# Altium PCB 3043-1-1532.PcbDoc (part 1 of 2)
Units mm, origin at the board's own origin, x right, y up, seen from the top; angles counter-clockwise.
Board outline 86 x 85.71 mm, 4 copper layers (Top Layer, MidLayer1, MidLayer2, Bottom Layer); 155 components, 106 nets, 490 pads, 369 vias.
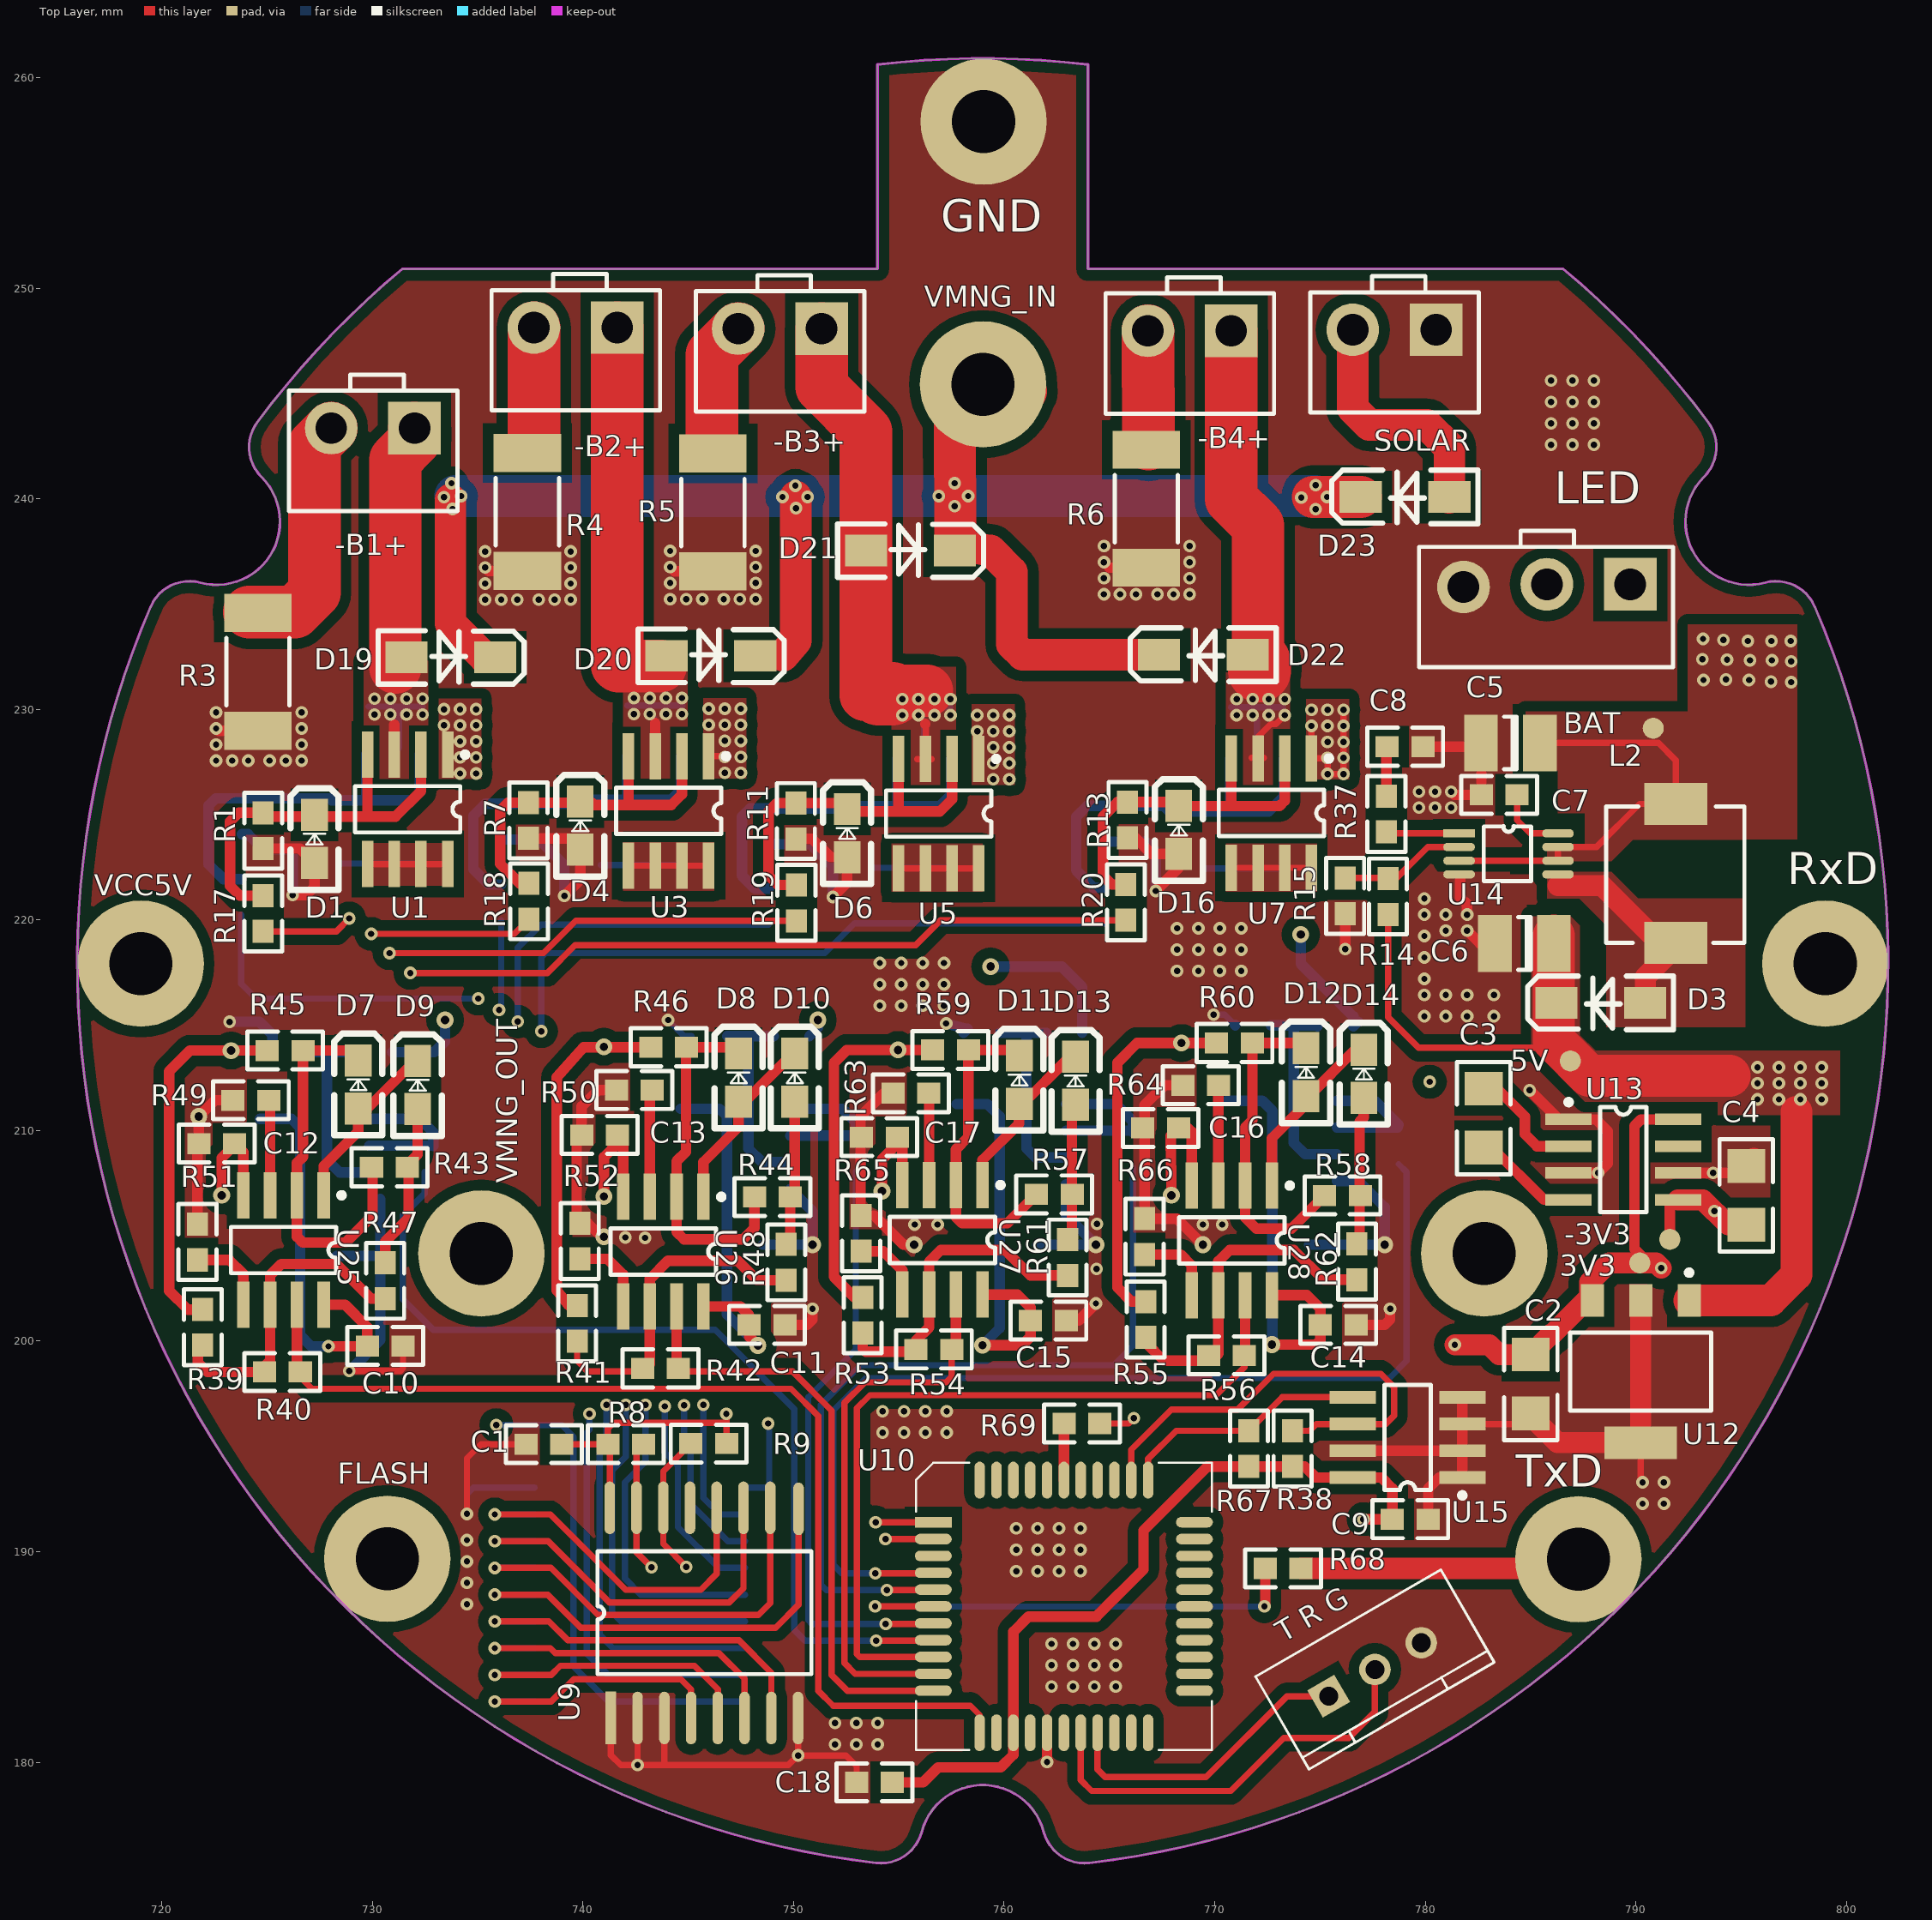
[diagram p0: Top Layer view]
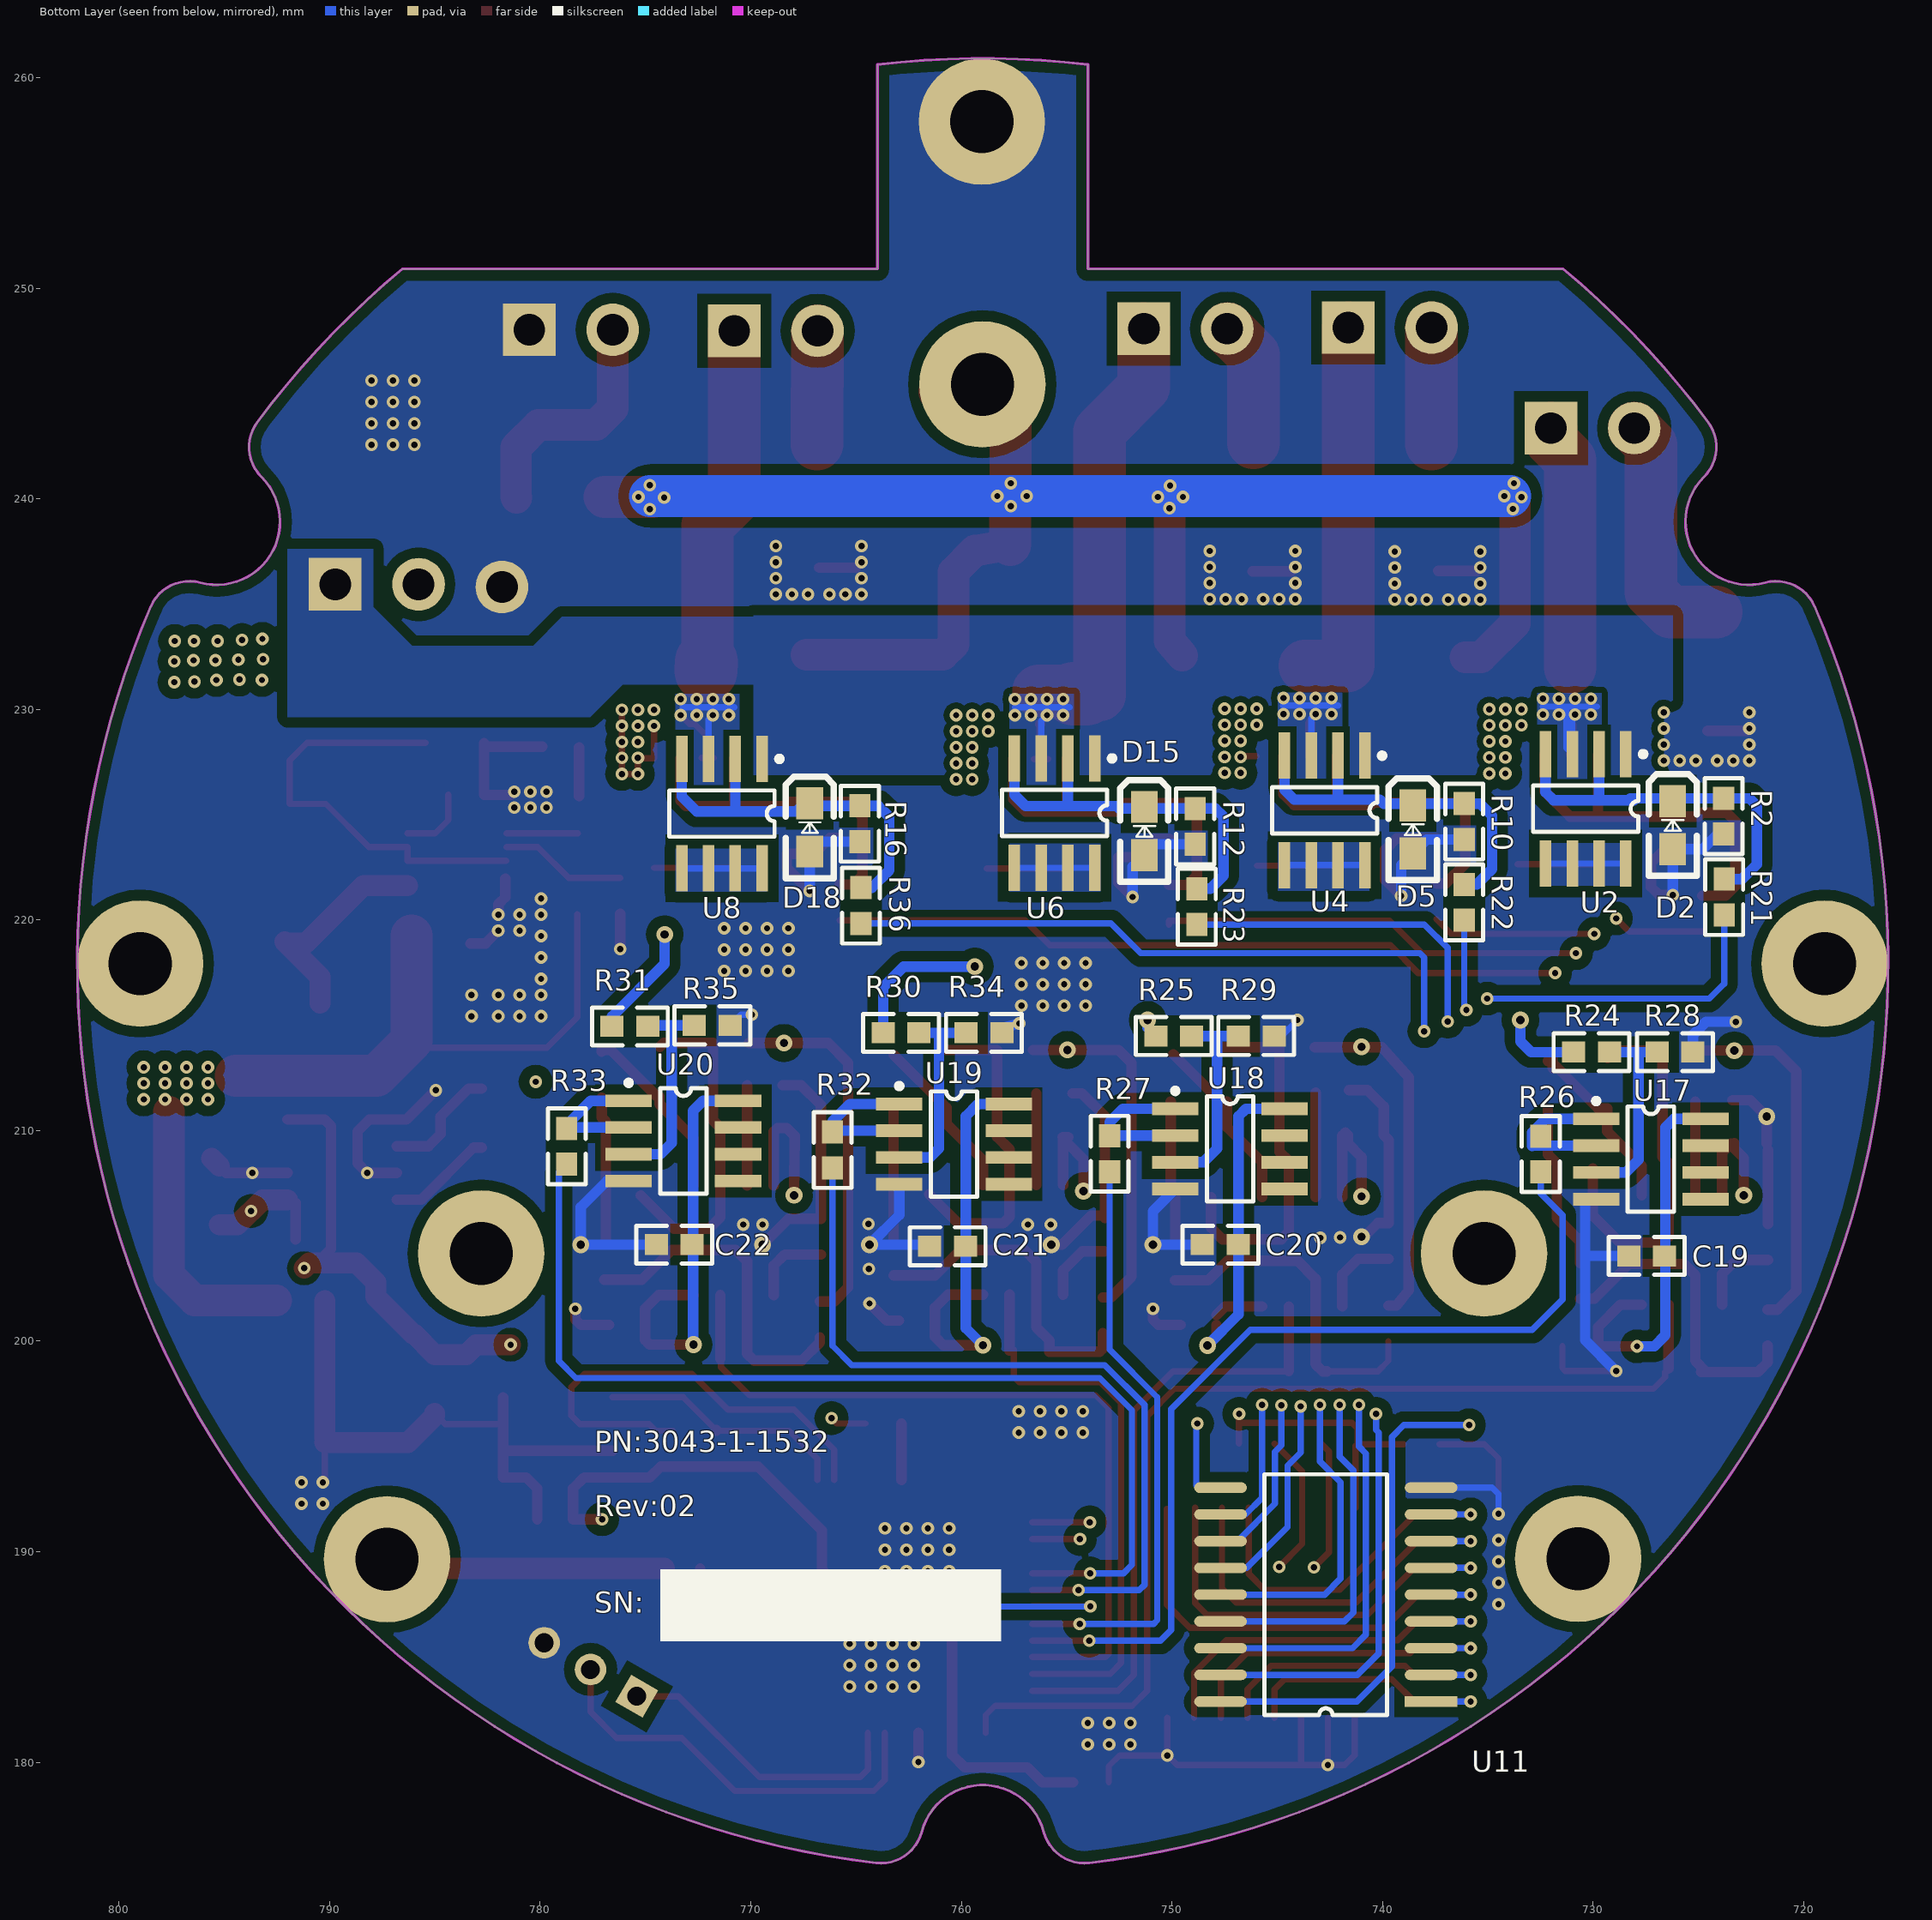
[diagram p1: Bottom Layer view, seen from below]
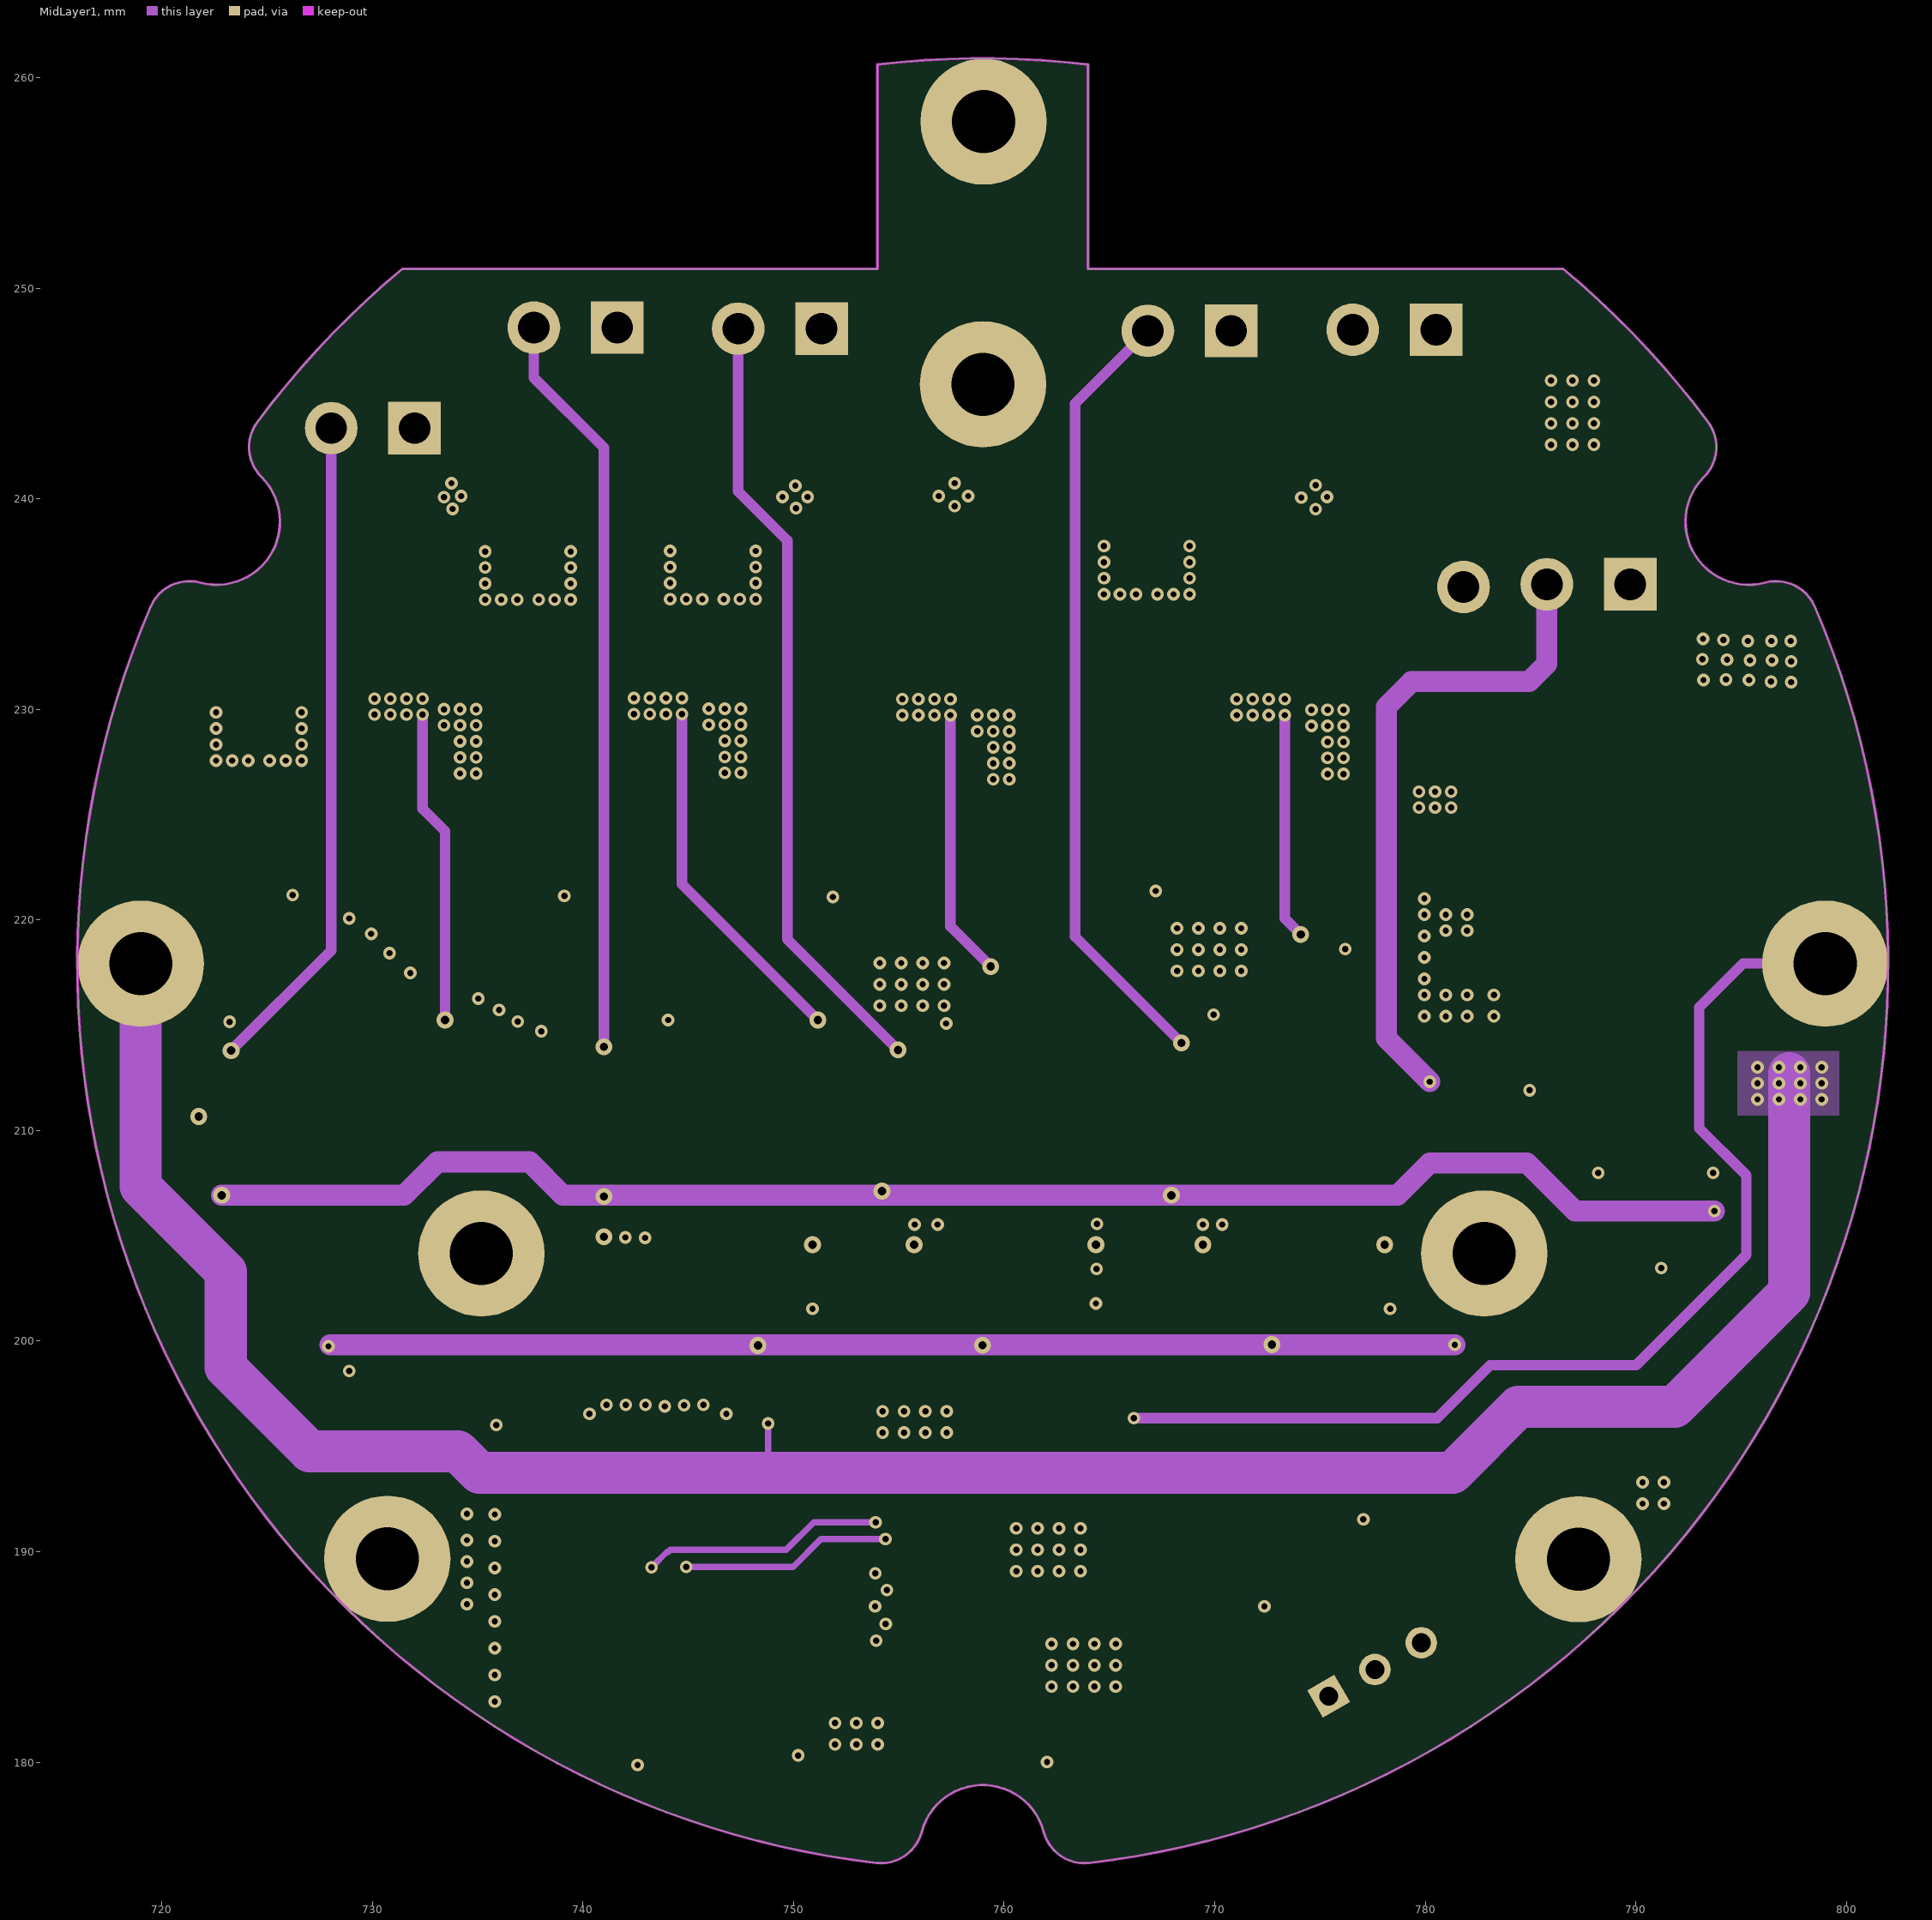
[diagram p2: MidLayer1]
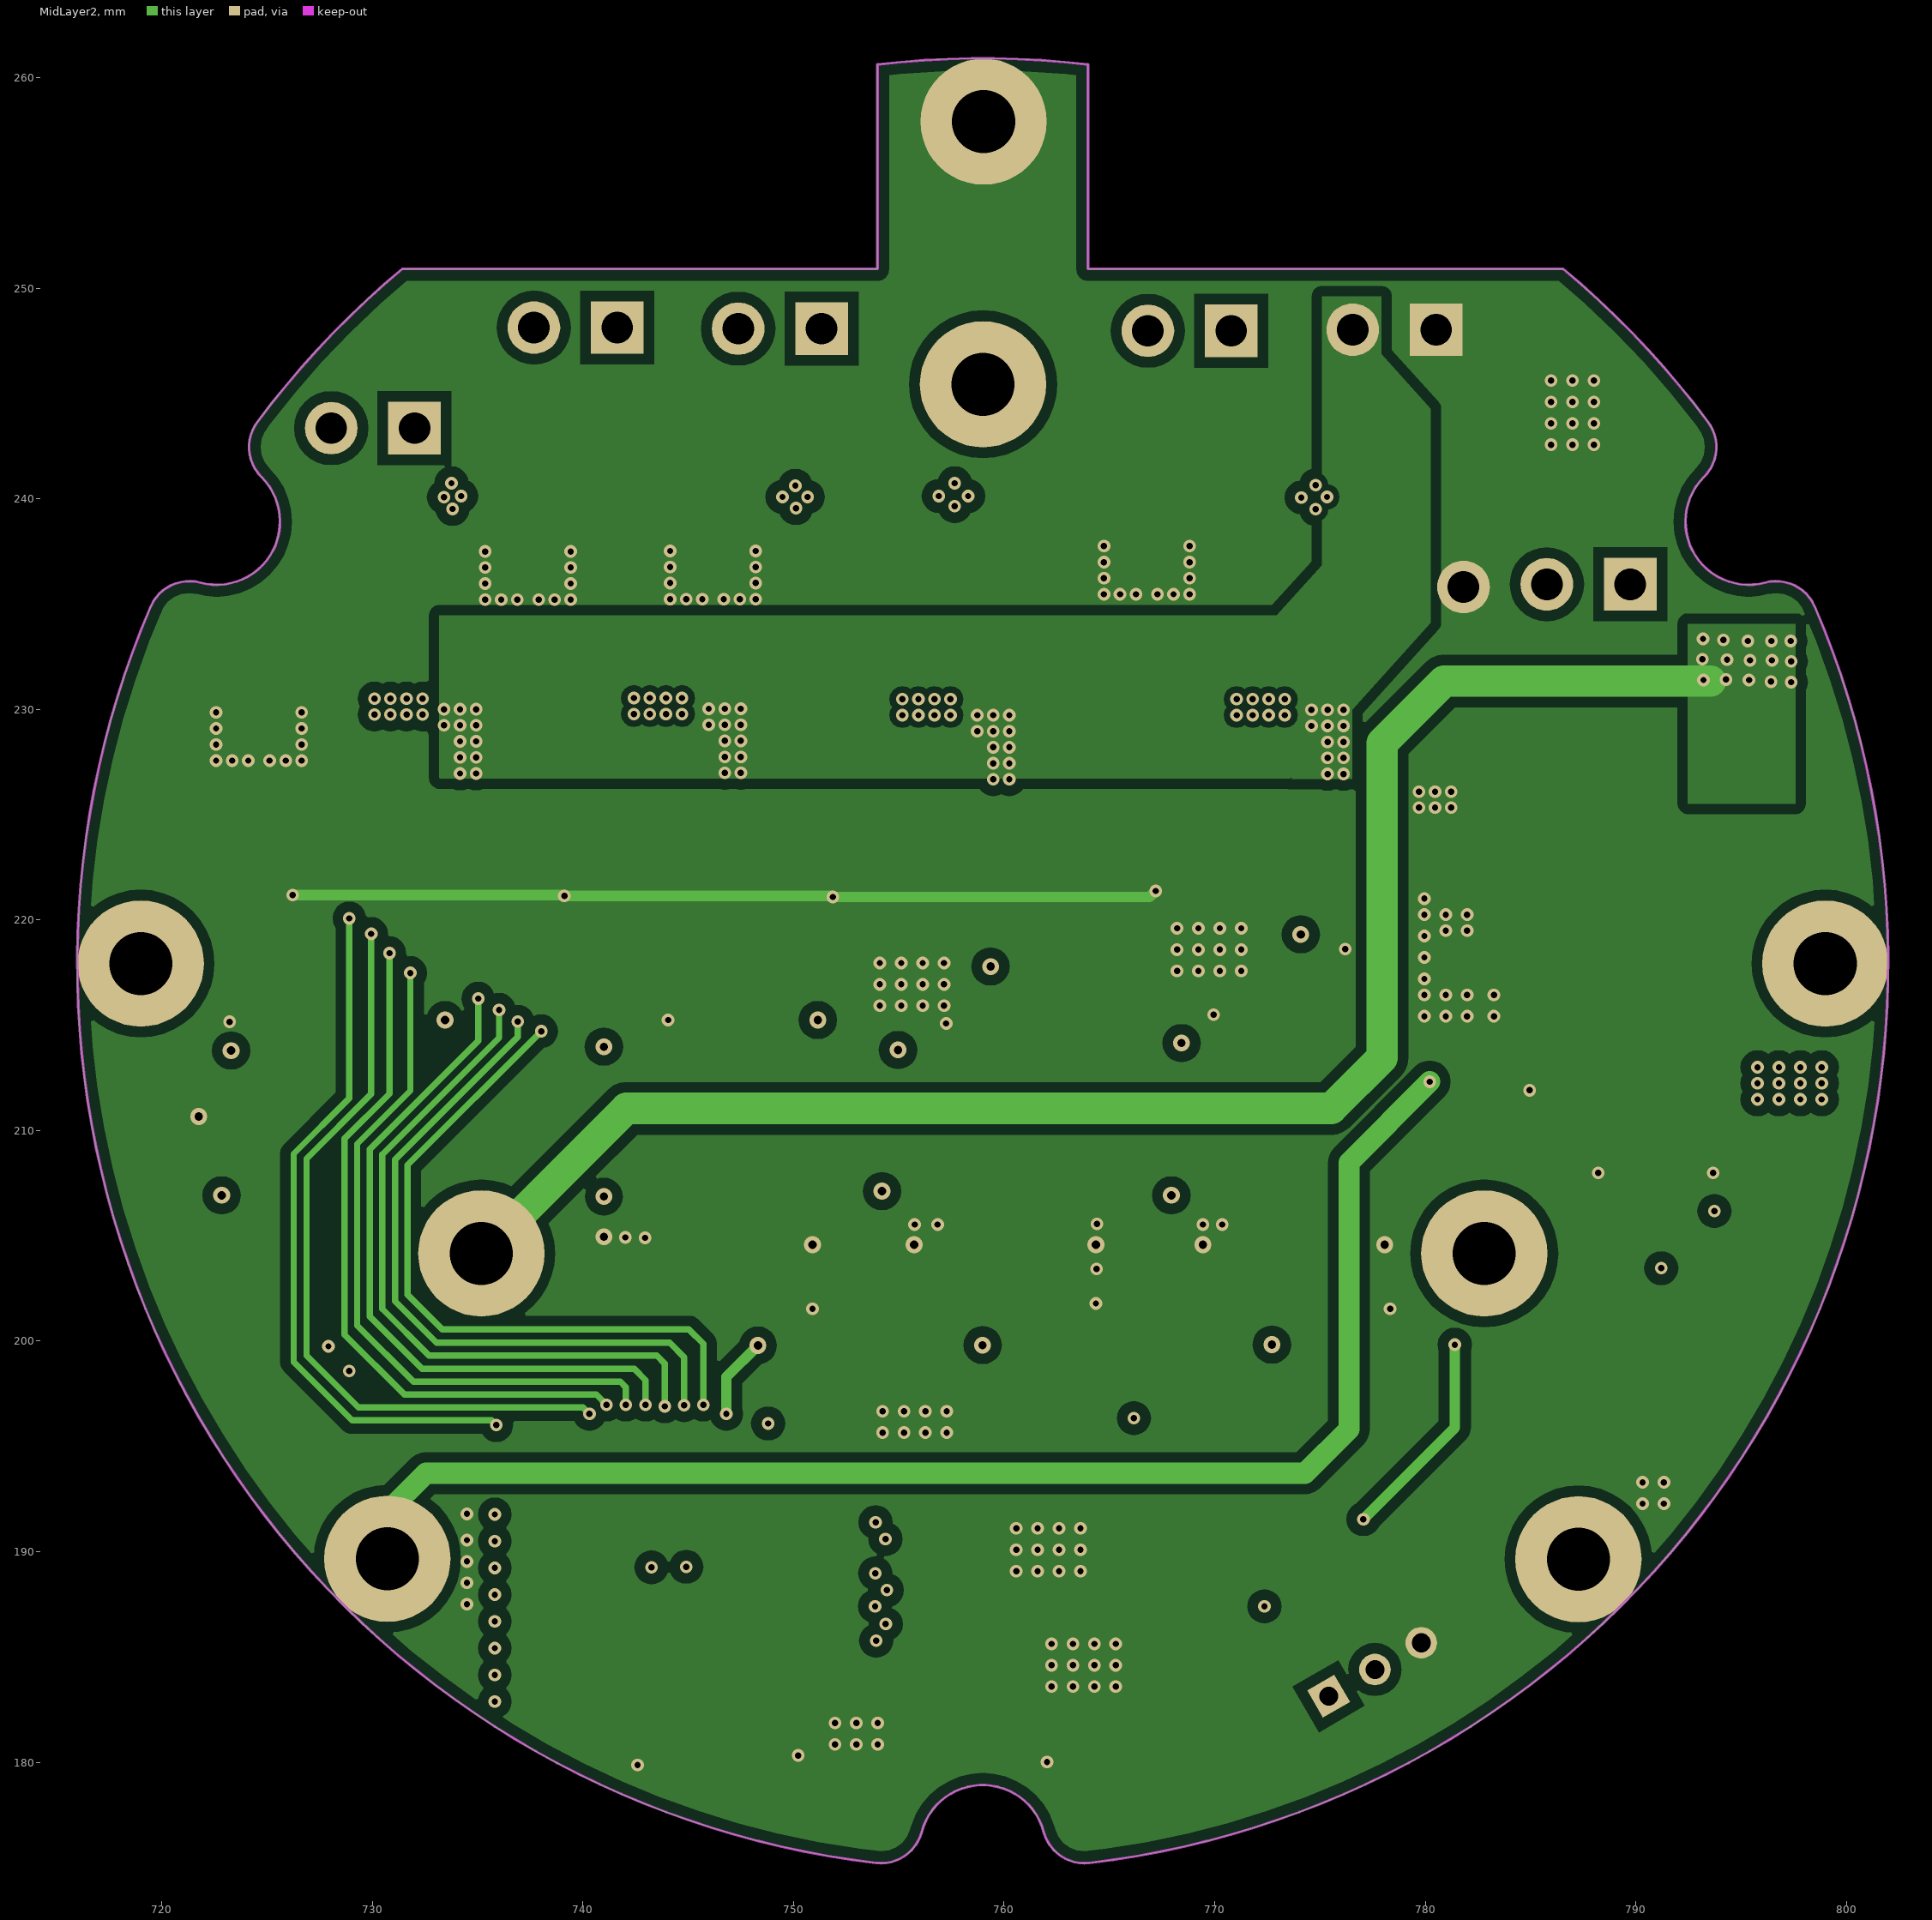
[diagram p3: MidLayer2]

## Layer stack, top to bottom
Top Layer: signal copper 0.0356
Dielectric: core 0.32, FR-4, Dk 4.8
MidLayer1: signal copper 0.0356
Dielectric: prepreg 0.32, FR-4, Dk 4.8
MidLayer2: signal copper 0.0356
Dielectric: core 0.32, FR-4, Dk 4.8
Bottom Layer: signal copper 0.0356

## Board outline
719.472,234.88 cw(c721.31,234.091) 721.831,236.022 ccw(c722.612,238.918) 724.73,241.043 cw(c726.142,242.46) 724.539,243.657 cw(c758.985,217.918) 731.417,250.918 753.985,250.918 753.985,260.627 cw(c758.985,217.918) 763.985,260.627 763.985,250.918 786.553,250.918 cw(c758.985,217.918) 793.431,243.657 cw(c791.829,242.46) 793.241,241.043 ccw(c795.358,238.918) 796.14,236.022 cw(c796.661,234.091) 798.499,234.88 cw(c758.985,217.918) 764.053,175.218 cw(c763.817,177.204) 761.884,176.69 ccw(c758.985,175.918) 756.086,176.69 cw(c754.153,177.204) 753.918,175.218 cw(c758.985,217.918)

## Design rules (kind name [scope] priority, off if disabled: settings)
Clearance [All] p1: gap=0.3
ComponentClearance [All] p1: gap=0 collisioncheckmode=2
HoleSize [All] p1: absolutevalues=TRUE maxlimit=10 minlimit=0.025 maxpercent=80.000 minpercent=20.000
PolygonConnect [All] p1: connectstyle=Direct reliefconductorwidth=0.254 reliefentries=4 polygonreliefangle="90 Angle"
RoutingLayers [All] p1: top layer_v5=TRUE mid layer 1_v5=FALSE mid layer 2_v5=FALSE bottom layer_v5=TRUE
RoutingVias [All] p1: holewidth=0.711 width=1.27 viastyle="Through Hole" minholewidth=0.711 minwidth=1.27 maxholewidth=0.711 maxwidth=1.27
SolderMaskExpansion [All] p1: expansion=0.102
TestPointUsage [All] p1: valid=0 allowmultiple=FALSE
Testpoint [All] p1: side=15 testpointundercomponent=TRUE minsize=1.016 maxsize=2.54 preferedsize=1.524 minholesize=0 maxholesize=1.016 preferedholesize=0.813 testpointgrid=0.025 style=1023 order=1234567890
Width [All] p1: maxlimit=10 minlimit=0.1 preferedwidth=0.254 toplayer_prefwidth=0.3 midlayer1_prefwidth=2 midlayer2_prefwidth=0.3 bottomlayer_prefwidth=0.3 minimp=50.000000 maximp=50.000000 favimp=50.000000
15 further rules are at their usual default settings.

## Classes and differential pairs
component class U_3-PWR_BAK_BATT: 3V3 5V -3V3 BAT C2 C3 C4 C5 C6 C7 C8 D3 D19 D20 D21 D22 D23 L2 R14 R15 R37 U12 U13 U14 VMNG_IN VMNG_OUT
component class U_4-PWR_MANAGE_3: C9 C18 C38 FLASH GND LED P1 R38 R67 R68 R69 RxD SCL SDA "T R G" TxD U10 U15 VCC5V
component class U_2-PWR_MANAGE: +BT1 +BT2 +BT3 +BT4 -B1+ -B2+ -B3+ -B4+ -BT1 -BT2 -BT3 -BT4 C1 CN1 CN2 D1 D2 D4 D5 D6 D15 D16 D18 DP1 NC1 NC2 NC3 NC4 ND1 ND2 ND3 ND4 R1 R2 R3 R4 R5 R6 R7 R8 R9 R10 R11 R12 R13 R16 R17 R18 R19 R20 R21 R22 R23 R36 SOLAR U1 U2 U3 U4 U5 U6 U7 U8 U9 U11
component class U_5-PWR_ADC: C10 C11 C12 C13 C14 C15 C16 C17 D7 D8 D9 D10 D11 D12 D13 D14 R39 R40 R41 R42 R43 R44 R45 R46 R47 R48 R49 R50 R51 R52 R53 R54 R55 R56 R57 R58 R59 R60 R61 R62 R63 R64 R65 R66 U25 U26 U27 U28
component class U_5-PWR_ADC2: C19 C20 C21 C22 R24 R25 R26 R27 R28 R29 R30 R31 R32 R33 R34 R35 U17 U18 U19 U20

## Components (designator, comment, footprint, x,y, rotation, side; value= is the part's Value field where it differs from the comment)
3V3 "TP" TP_1MM 790.194,203.708 r90 top
5V "TP" TP_1MM 786.892,213.309 r0 top
-3V3 "TP" TP_1MM 791.616,204.835 r90 top
-B1+ "Header 2" VH-02H 729.463,243.357 r180 top
-B2+ "Header 2" VH-02H 739.089,248.133 r180 top
-B3+ "Header 2" VH-02H 748.792,248.082 r180 top
-B4+ "Header 2" VH-02H 768.248,247.98 r180 top
BAT "TP" TP_1MM 790.829,229.108 r90 top
C1 "100nF_20%_0603" C1608-0603 738.149,195.107 r180 top
C2 "10uF_20%_1206" CC3216-1206 785.012,196.825 r270 top
C3 "10uF_20%_1206" CC3216-1206 782.777,209.448 r270 top
C4 "10uF_20%_1206" CC3216-1206 795.249,208.061 r90 top
C5 "10uF_20%_1210" CC3225-1210 784.047,228.406 r180 top
C6 "10uF_20%_1210" CC3225-1210 784.708,218.881 r180 top
C7 "10nF_20%_0603" C1608-0603 783.514,225.943 r180 top
C8 "10nF_20%_0603" C1608-0603 779.043,228.229 r0 top
C9 "100nF_20%_0603" C1608-0603 779.288,191.541 r0 top
C10 "100nF_20%_0603" C1608-0603 730.606,199.771 r0 top
C11 "100nF_20%_0603" C1608-0603 748.741,200.771 r0 top
C12 "100nF_20%_0603" C1608-0603 722.605,209.382 r180 top
C13 "100nF_20%_0603" C1608-0603 740.791,209.788 r180 top
C14 "100nF_20%_0603" C1608-0603 775.868,200.771 r0 top
C15 "100nF_20%_0603" C1608-0603 762.102,200.974 r0 top
C16 "100nF_20%_0603" C1608-0603 767.436,210.118 r180 top
C17 "100nF_20%_0603" C1608-0603 754.075,209.687 r180 top
C18 "100nF_20%_0603" C1608-0603 753.847,179.045 r180 top
C19 "100nF_20%_0603" C1608-0603 727.456,204.048 r0 bottom
C20 "100nF_20%_0603" C1608-0603 747.7,204.581 r0 bottom
C21 "100nF_20%_0603" C1608-0603 760.654,204.505 r0 bottom
C22 "100nF_20%_0603" C1608-0603 773.633,204.581 r0 bottom
D1 "5.1V" LED0805 727.253,223.961 r270 top
D2 "5.1V" LED0805 726.211,224.622 r270 bottom
D3 "D Schottky" DO-214AB_SS14 791.54,214.792 r180 top
D4 "5.1V" LED0805 739.877,224.596 r270 top
D5 "5.1V" LED0805 738.556,224.419 r270 bottom
D6 "5.1V" LED0805 752.551,224.241 r270 top
D7 "1N4148" LED0805 729.336,212.303 r270 top
D8 "1N4148" LED0805 747.395,212.633 r270 top
D9 "1N4148" LED0805 732.155,212.277 r270 top
D10 "1N4148" LED0805 750.062,212.633 r270 top
D11 "1N4148" LED0805 760.73,212.531 r270 top
D12 "1N4148" LED0805 774.344,212.887 r270 top
D13 "1N4148" LED0805 763.397,212.481 r270 top
D14 "1N4148" LED0805 777.088,212.811 r270 top
D15 "5.1V" LED0805 751.307,224.342 r270 bottom
D16 "5.1V" LED0805 768.299,224.393 r270 top
D18 "5.1V" LED0805 767.193,224.509 r270 bottom
D19 "SS14" DO-214AB_SS14 730.529,233.74 r0 top
D20 "SS14" DO-214AB_SS14 742.874,233.817 r0 top
D21 "SS14" DO-214AB_SS14 752.348,238.811 r0 top
D22 "SS14" DO-214AB_SS14 772.668,231.327 r180 top
D23 "SS14" DO-214AB_SS14 782.244,238.82 r180 top
FLASH "ND" END_3_6 730.707,189.662 r0 top
GND "ND" END_3_6 759.028,257.912 r0 top
L2 "Inductor" L6x6x3_3A 790.626,222.971 r270 top
LED "Header 3" VH-03H 789.737,235.941 r180 top
R1 "4.7K_1%_0603" C1608-0603 724.814,224.241 r270 top
R2 "4.7K_1%_0603" C1608-0603 723.798,224.927 r270 bottom
R3 "25mR_1%_3225" CR6332-2512 724.56,231.785 r270 top
R4 "25mR_1%_3225" CR6332-2512 737.362,239.379 r270 top
R5 "25mR_1%_3225" CR6332-2512 746.176,239.354 r270 top
R6 "25mR_1%_3225" CR6332-2512 766.75,239.532 r270 top
R7 "4.7K_1%_0603" C1608-0603 737.413,224.723 r270 top
R8 "4.7K_5%_0603" C1608-0603 742.036,195.107 r0 top
R9 "4.7K_5%_0603" C1608-0603 745.973,195.132 r180 top
R10 "4.7K_1%_0603" C1608-0603 736.117,224.673 r270 bottom
R11 "4.7K_1%_0603" C1608-0603 750.113,224.698 r270 top
R12 "4.7K_1%_0603" C1608-0603 748.894,224.444 r270 bottom
R13 "4.7K_1%_0603" C1608-0603 765.861,224.749 r270 top
R14 "15K_1%_0603" C1608-0603 778.231,221.117 r90 top
R15 "2K_1%_0603" C1608-0603 776.199,221.142 r270 top
R16 "4.7K_1%_0603" C1608-0603 764.819,224.571 r270 bottom
R17 "50R_1%_0603" C1608-0603 724.814,220.304 r90 top
R18 "50R_1%_0603" C1608-0603 737.438,220.888 r90 top
R19 "50R_1%_0603" C1608-0603 750.138,220.812 r90 top
R20 "50R_1%_0603" C1608-0603 765.785,220.837 r90 top
R21 "50R_1%_0603" C1608-0603 723.773,221.091 r90 bottom
R22 "50R_1%_0603" C1608-0603 736.117,220.837 r90 bottom
R23 "50R_1%_0603" C1608-0603 748.817,220.634 r90 bottom
R24 "10K_5%_0603" C1608-0603 730.072,213.725 r0 bottom
R25 "10K_5%_0603" C1608-0603 749.91,214.487 r0 bottom
R26 "10K_5%_0603" C1608-0603 732.485,208.89 r270 bottom
R27 "10K_5%_0603" C1608-0603 752.958,208.899 r270 bottom
R28 "10K_5%_0603" C1608-0603 726.11,213.725 r0 bottom
R29 "10K_5%_0603" C1608-0603 745.998,214.487 r0 bottom
R30 "10K_5%_0603" C1608-0603 762.864,214.64 r0 bottom
R31 "10K_5%_0603" C1608-0603 775.741,214.944 r0 bottom
R32 "10K_5%_0603" C1608-0603 766.115,209.077 r270 bottom
R33 "10K_5%_0603" C1608-0603 778.739,209.255 r270 bottom
R34 "10K_5%_0603" C1608-0603 758.927,214.64 r0 bottom
R35 "10K_5%_0603" C1608-0603 771.83,214.995 r0 bottom
R36 "50R_1%_0603" C1608-0603 764.769,220.685 r90 bottom
R37 "10K_1%_0603" C1608-0603 778.154,225.028 r90 top
R38 "4.7K_5%_0603" C1608-0603 773.7,194.894 r270 top
R39 "20K_5%_0603" C1608-0603 721.944,200.66 r90 top
R40 "200K_5%_0603" C1608-0603 725.729,198.533 r180 top
R41 "20K_5%_0603" C1608-0603 739.724,200.838 r90 top
R42 "200K_5%_0603" C1608-0603 743.687,198.704 r180 top
R43 "20K_5%_0603" C1608-0603 730.809,208.255 r180 top
R44 "20K_5%_0603" C1608-0603 748.995,206.842 r180 top
R45 "20K_5%_0603" C1608-0603 725.856,213.799 r180 top
R46 "20K_5%_0603" C1608-0603 744.068,213.954 r180 top
R47 "10K_5%_0603" C1608-0603 730.606,202.865 r90 top
R48 "10K_5%_0603" C1608-0603 749.656,203.743 r90 top
R49 "10K_5%_0603" C1608-0603 724.23,211.439 r180 top
R50 "10K_5%_0603" C1608-0603 742.442,211.922 r180 top
R51 "10K_5%_0603" C1608-0603 721.69,204.706 r90 top
R52 "10K_5%_0603" C1608-0603 739.851,204.749 r90 top
R53 "20K_5%_0603" C1608-0603 753.288,201.228 r90 top
R54 "200K_5%_0603" C1608-0603 756.666,199.603 r180 top
R55 "20K_5%_0603" C1608-0603 766.724,201.025 r90 top
R56 "200K_5%_0603" C1608-0603 770.56,199.323 r180 top
R57 "20K_5%_0603" C1608-0603 762.381,206.969 r180 top
R58 "20K_5%_0603" C1608-0603 776.072,206.918 r180 top
R59 "20K_5%_0603" C1608-0603 757.453,213.827 r180 top
R60 "20K_5%_0603" C1608-0603 770.941,214.157 r180 top
R61 "10K_5%_0603" C1608-0603 763.016,203.972 r90 top
R62 "10K_5%_0603" C1608-0603 776.757,203.768 r90 top
R63 "10K_5%_0603" C1608-0603 755.574,211.769 r180 top
R64 "10K_5%_0603" C1608-0603 769.341,212.15 r180 top
R65 "10K_5%_0603" C1608-0603 753.212,205.115 r90 top
R66 "10K_5%_0603" C1608-0603 766.674,204.962 r90 top
R67 "4.7K_5%_0603" C1608-0603 771.627,194.894 r270 top
R68 "0R_5%_0603" C1608-0603 773.252,189.205 r0 top
R69 "0R_5%_0603" C1608-0603 763.702,196.088 r0 top
RxD "ND" END_3_6 799,217.932 r0 top locked
SOLAR "Header 2" VH-02H 777.977,248.031 r180 top
"T R G" "Header 3" XH-03H 775.411,183.134 r30 top
TxD "ND" END_3_6 787.273,189.636 r0 top locked
U1 "SI4953DY" SO-8 731.672,225.257 r180 top
U2 "SI4953DY" SO-8 730.352,225.282 r0 bottom
U3 "SI4953DY" SO-8 744.068,225.181 r180 top
U4 "SI4953DY" SO-8 742.747,225.206 r0 bottom
U5 "SI4953DY" SO-8 756.895,225.054 r180 top
U6 "SI4953DY" SO-8 755.574,225.079 r0 bottom
U7 "SI4953DY" SO-8 772.693,225.079 r180 top
U8 "SI4953DY" SO-8 771.373,225.054 r0 bottom
U9 "PCF8574T" SOP16_P1.27_B10 743.814,184.591 r90 top
U10 "STC15F2K60S2_QFP44" PQFP44 756.641,191.399 r0 top
U11 "ULN2803" SOP18_P1.28_B10 737.692,182.88 r0 bottom
U12 "Volt Reg" SOT223 791.118,199.187 r180 top
U13 "TP7660" SO-8 789.407,208.62 r270 top
U14 "MP1542" MSOP8 781.609,224.114 r0 top
U15 "24LC128" 8s1 779.161,195.428 r90 top
U17 "LM358D" 751-02 727.253,208.647 r270 bottom
U18 "LM358D" 751-02 747.243,209.128 r270 bottom
U19 "LM358D" 751-02 760.349,209.356 r270 bottom
U20 "LM358D" 751-02 773.201,209.509 r270 bottom
U25 "LM358D" 751-02 725.78,204.325 r180 top
U26 "LM358D" 751-02 743.814,204.251 r180 top
U27 "LM358D" 751-02 757.072,204.81 r180 top
U28 "LM358D" 751-02 770.814,204.784 r180 top
VCC5V "ND" END_3_6 718.998,217.932 r0 top locked
VMNG_IN "ND" END_3_6 759,245.44 r0 top
VMNG_OUT "ND" END_3_6 735.178,204.165 r90 top locked

## Footprints (in the part's own frame and the unit in brackets; to place one, negate y for a bottom-side part, rotate by r counter-clockwise, add the part's x,y. Pads: shape width x height; smd on the part's side, far side on the other; paste and mask are expansions set on the pad)
8s1 [mm] "Small Outline; 8 Leads; Body Width 3.9 mm; Pitch 1.27 mm"
  rect 0.6x2.2 smd: 1(-1.905,-2.6) 2(-0.635,-2.6) 3(0.635,-2.6) 4(1.905,-2.6) 5(1.905,2.6) 6(0.635,2.6) 7(-0.635,2.6) 8(-1.905,2.6)
  silkscreen extent -2.88,-2.72 2.5,1.1
751-02 [mm] "Small Outline; 8 Leads; Body Width 3.9 mm; Pitch 1.27 mm"
  rect 0.6x2.2 smd: 1(-1.905,-2.6) 2(-0.635,-2.6) 3(0.635,-2.6) 4(1.905,-2.6) 5(1.905,2.6) 6(0.635,2.6) 7(-0.635,2.6) 8(-1.905,2.6)
  silkscreen extent -2.88,-2.72 2.5,1.1
C1608-0603 [mm] "Chip Resistor; Body 1.6 x 0.8 mm (LxW typ)"
  rect 1.1x1 smd: 1(-0.85,0) 2(0.85,0)
  silkscreen extent -1.8,-0.9 1.8,0.9
CC3216-1206 [mm]
  rect 1.6x1.8 smd: 1(-2.54,0) 2(0.26,0)
  silkscreen extent -3.81,-1.27 1.52,1.27
CC3225-1210 [mm] "Chip Capacitor; Body 3.2 x 2.5 mm (LxW typ)"
  rect 1.6x2.7 smd: 1(-1.4,0) 2(1.4,0)
  silkscreen extent -0.3,-1.25 0.3,1.25
CR6332-2512 [mm] "Chip Resistor; Body 6.3 x 3.2 mm (LxW typ)"
  rect 1.8x3.2 smd: 1(-2.8,0) 2(2.8,0)
  silkscreen extent -1.6,-1.5 1.6,1.5
DO-214AB_SS14 [mm]
  rect 2x1.5 smd: 1(1.092,-1.27) 2(5.309,-1.27)
  silkscreen extent -0.25,-2.54 6.68,0
END_3_6 [mm]
  round 6 hole 3: 1(0,0)
L6x6x3_3A [mm]
  rect 2x3 smd: 1(-2.54,1.27) 2(4.064,1.27)
  silkscreen extent -2.41,-2.03 4.06,4.53
LED0805 [mil]
  rect 60x50 smd: 1(49.55,-0.2) 2(-40.45,-0.2)
  silkscreen extent -90,-45 100,45
MSOP8 [mm]
  rect 1.5x0.4 smd: 1(0,0)
  oval 1.5x0.4 smd: 2(0,-0.65) 3(0,-1.3) 4(0,-1.95) 5(4.695,-1.95) 6(4.695,-1.3) 7(4.695,-0.65) 8(4.695,0)
  silkscreen extent 1.17,-2.28 3.42,0.33
PQFP44 [mm]
  rect 1.75x0.5 smd: 1(0,0)
  oval 1.75x0.5 smd: 2(0,-0.8) 3(0,-1.6) 4(0,-2.4) 5(0,-3.2) 6(0,-4) 7(0,-4.8) 8(0,-5.6) 9(0,-6.4) 10(0,-7.2) 11(0,-8) 23(12.4,-8) 24(12.4,-7.2) 25(12.4,-6.4) 26(12.4,-5.6) 27(12.4,-4.8) 28(12.4,-4) 29(12.4,-3.2) 30(12.4,-2.4) 31(12.4,-1.6) 32(12.4,-0.8) 33(12.4,0)
  oval 0.5x1.75 smd: 12(2.2,-10) 13(3,-10) 14(3.8,-10) 15(4.6,-10) 16(5.4,-10) 17(6.2,-10) 18(7,-10) 19(7.8,-10) 20(8.6,-10) 21(9.4,-10) 22(10.2,-10) 34(10.2,2) 35(9.4,2) 36(8.6,2) 37(7.8,2) 38(7,2) 39(6.2,2) 40(5.4,2) 41(4.6,2) 42(3.8,2) 43(3,2) 44(2.2,2)
  silkscreen extent -0.82,-10.83 13.23,2.83
SO-8 [mm] "Plastic Small Outline; 8 Leads; Body Width 3.9 mm"
  rect 0.55x2.2 smd: 1(-1.905,-2.6) 2(-0.635,-2.6) 3(0.635,-2.6) 4(1.905,-2.6) 5(1.905,2.6) 6(0.635,2.6) 7(-0.635,2.6) 8(-1.905,2.6)
  silkscreen extent -2.85,-2.72 2.5,1.1
SOP16_P1.27_B10 [mm]
  rect 2.5x0.5 smd: 1(-2.489,2.489)
  oval 2.5x0.5 smd: 2(-2.489,1.219) 3(-2.489,-0.051) 4(-2.489,-1.321) 5(-2.489,-2.591) 6(-2.489,-3.861) 7(-2.489,-5.131) 8(-2.489,-6.401) 9(7.442,-6.426) 10(7.493,-5.08) 11(7.493,-3.81) 12(7.493,-2.54) 13(7.493,-1.27) 14(7.493,0) 15(7.493,1.27) 16(7.493,2.54)
  silkscreen extent -0.4,-7.04 5.43,3.12
SOP18_P1.28_B10 [mm]
  rect 2.5x0.5 smd: 1(0,0)
  oval 2.5x0.5 smd: 2(0,-1.27) 3(0,-2.54) 4(0,-3.81) 5(0,-5.08) 6(0,-6.35) 7(0,-7.62) 8(0,-8.89) 9(0,-10.16) 10(10,-10.16) 11(10,-8.89) 12(10,-7.62) 13(10,-6.35) 14(10,-5.08) 15(10,-3.81) 16(10,-2.54) 17(10,-1.27) 18(10,0)
  silkscreen extent 2.08,-10.79 7.92,0.64
SOT223 [mm]
  rect 1.1x1.55 smd: 1(-1.414,-2.74) 2(0.886,-2.74) 3(3.186,-2.74)
  rect 3.45x1.55 smd: 2(0.886,4.01)
  silkscreen extent -2.46,-4.19 4.24,2.48
TP_1MM [mm]
  round 1 smd: 1(0,0)
VH-02H [mm] "VH Serial,3.96mm pitch"
  rect 2.5x2.5 hole 1.5: 1(-2.54,0)
  round 2.5 hole 1.5: 2(1.42,0)
  silkscreen extent -4.57,-2.54 3.43,3.94
VH-03H [mm] "VH Serial,3.96mm pitch"
  rect 2.5x2.5 hole 1.5: 1(0,0)
  round 2.5 hole 1.5: 2(3.96,0) 3(7.92,0.127)
  silkscreen extent -2.03,-2.54 10.03,3.94
XH-03H [mm] "XH Serial,2.54mm pitch"
  rect 1.5x1.5 hole 0.9: 1(0,0)
  round 1.5 hole 0.9: 2(2.54,0) 3(5.08,0)
  silkscreen extent -2.54,-2.54 7.62,2.54

## Part data
3V3 5V -3V3 BAT: library part TP_1mm
-B1+ -B2+ -B3+ -B4+ SOLAR: "Header, 2-Pin"
C1 C2 C3 C4 C5 C6 C7 C8 C9 C10 C11 C12 C13 C14 C15 C16 C17 C18 C19 C20 C21 C22: library part Cap2, "Capacitor"
D1 D2 D4 D5 D6 D15 D16 D18 D19 D20 D21 D22 D23: library part "D Schottky", "Schottky Diode"
D3: "Schottky Diode"
D7 D8 D9 D10 D11 D12 D13 D14: library part "D Tunnel1", "Tunnel Diode - RLC Model"
FLASH RxD TxD VCC5V VMNG_IN VMNG_OUT: library part COAX-F, "Coax-F Connector"
LED "T R G": "Header, 3-Pin"
R1 R2 R3 R4 R5 R6 R7 R8 R9 R10 R11 R12 R13 R14 R15 R16 R17 R18 R19 R20 R21 R22 R23 R24 R25 R26 R27 R28 R29 R30 R31 R32 R33 R34 R35 R36 R37 R38 R39 R40 R41 R42 R43 R44 R45 R46 R47 R48 R49 R50 R51 R52 R53 R54 R55 R56 R57 R58 R59 R60 R61 R62 R63 R64 R65 R66 R67 R68 R69: library part Res3, "Resistor"
U1 U2 U3 U4 U5 U6 U7 U8: library part TLP3107, "TLP3107"
U11: library part RSM485S_CTM8251T, "RSM485S_CTM8251T"
U12: "Voltage Regulator"
U14: library part AP2004
U15: library part 24LC02, "IC"
U17 U18 U19 U20 U25 U26 U27 U28: "Dual Low-Power Operational Amplifier"

## Free pads (board coordinates)
  round 6 hole 3: 7(782.803,204.165)

## Via types
v1: diameter 0.6, hole 0.3, Top Layer to Bottom Layer, 347 vias
v2: diameter 0.8, hole 0.4, Top Layer to Bottom Layer, 22 vias

## Nets (pads, with @x,y where several pads share a name; then routed paths per layer and width w, separated by ;. In a path a pad name is that pad's centre, name@x,y a point inside that pad or via, vN(x,y) a via of type N, cw(c..) or ccw(c..) an arc to the next point about the centre after c; other vN are vias at no path point)
BC1: R40.1 U10.12 U25.7 | length 50.6
  Top Layer w0.3: R40.1@726.579,198.533 726.579,198.286 727.126,197.739 749.884,197.739 751.18,196.444 751.18,183.388 751.881,182.686 758.368,182.677 ; 758.393,182.686 758.841,182.239 U10.12@758.841,181.399
  Top Layer w0.5: R40.1@726.415,198.698 U25.7@726.415,201.725
BC2: R42.1 U10.11 U26.7 | length 28.8
  Top Layer w0.3: R42.1@744.537,198.561 749.951,198.561 751.815,196.698 751.815,184.15 752.566,183.399 U10.11@756.641,183.399
  Top Layer w0.5: R42.1@744.449,198.587 U26.7@744.449,201.651
BC3: R54.1 U10.10 U27.7 | length 26.3
  Top Layer w0.3: U10.10@756.641,184.199 752.934,184.199 752.415,184.718 752.415,197.069 753.389,198.044 757.25,198.044 757.516,198.31 R54.1@757.516,199.603
  Top Layer w0.5: R54.1@757.707,199.564 U27.7@757.707,202.21
BC4: R56.1 U10.9 U28.7 | length 38.2
  Top Layer w0.3: U10.9@756.641,184.999 753.15,184.999 753.015,185.134 753.015,196.82 753.628,197.434 770.077,197.434 771.41,198.767 R56.1@771.41,199.323
  Top Layer w0.5: R56.1@771.449,199.157 U28.7@771.449,202.184
BV1: R26.2 U10.8 | length 44.5
  Top Layer w0.3: v1(753.923,185.776) U10.8@756.641,185.773
  Bottom Layer w0.3: R26.2@732.485,208.04 732.485,207.01 731.444,205.969 731.444,201.981 732.892,200.533 746.277,200.533 750.037,196.774 750.037,186.284 750.547,185.773 v1(753.923,185.776)
BV2: R27.2 U10.7 | length 28.3
  Top Layer w0.3: v1(754.38,186.563) U10.7@756.641,186.573
  Bottom Layer w0.3: R27.2@752.958,208.049 752.958,199.593 750.697,197.333 750.697,186.741 750.865,186.573 v1(754.38,186.563)
BV3: R32.2 U10.5 | length 38.4
  Top Layer w0.3: v1(754.43,188.173) U10.5@756.641,188.173
  Bottom Layer w0.3: v1(754.43,188.173) 751.551,188.173 751.297,188.427 751.297,196.967 753.186,198.857 765.2,198.857 766.115,199.771 R32.2@766.115,208.227
BV4: R33.2 U10.4 | length 49.9
  Top Layer w0.3: v1(753.884,188.973) U10.4@756.641,188.973
  Bottom Layer w0.3: v1(753.884,188.973) 752.3,188.973 751.897,189.376 751.897,196.719 753.425,198.247 778.307,198.247 779.12,199.06 779.12,208.024 R33.2@778.739,208.405
C_BT1: -B1+.2 R3.1 R39.2 R45.2 | length 60.4
  Top Layer w0.5: R39.2@721.716,201.492 721.247,201.492 720.344,202.394 720.344,212.808 721.335,213.799 R45.2@725.006,213.799
  Top Layer w2.5: R3.1@724.154,234.62 726.313,234.62 727.253,235.56 727.253,242.568 -B1+.2@728.043,243.357
  MidLayer1 w0.5: v2(723.29,213.799) 728.043,218.551 -B1+.2@728.043,243.357
C_BT2: -B2+.2 R4.1 R41.2 R46.2 | length 57.6
  Top Layer w0.5: R41.2@739.724,201.688 739.331,201.688 738.759,202.413 738.759,212.531 740.029,213.954 R46.2@743.218,213.954
  Top Layer w2.5: R4.1@737.669,242.593 -B2+.2@737.669,248.133
  MidLayer1 w0.5: -B2+.2@737.669,248.133 737.669,245.752 740.994,242.427 v2(740.994,213.979)
C_BT3: -B3+.2 R5.1 R53.2 R59.2 | length 60.2
  Top Layer w0.5: R53.2@753.288,202.078 752.895,202.078 751.916,203.057 751.916,213.217 752.526,213.827 R59.2@756.603,213.827
  Top Layer w2.5: R5.1@746.125,242.656 746.125,246.835 -B3+.2@747.372,248.082
  MidLayer1 w0.5: -B3+.2@747.372,248.082 747.372,240.358 749.706,238.023 749.706,219.085 v2(754.964,213.827)
C_BT4: -B4+.2 R6.1 R55.2 R60.2 | length 60.1
  Top Layer w0.5: R55.2@766.724,201.875 766.052,201.875 765.378,202.549 765.378,213.217 766.318,214.157 R60.2@770.091,214.157
  Top Layer w2.5: -B4+.2@766.828,247.98 R6.1@766.851,242.595
  MidLayer1 w0.5: -B4+.2@766.828,247.98 763.372,244.523 763.372,219.212 v2(768.426,214.157)
CTRL_0: U9.4 U11.1 | length 13.2
  Top Layer w0.3: v1(735.813,182.88) 738.495,182.88 739.562,183.947 744.652,183.947 745.134,183.464 U9.4@745.134,182.102
  Bottom Layer w0.3: v1(735.813,182.88) U11.1@737.692,182.88
CTRL_1: U9.5 U11.2 | length 14.5
  Top Layer w0.3: v1(735.813,184.15) 738.495,184.15 738.927,184.582 745.287,184.582 746.404,183.464 U9.5@746.404,182.102
  Bottom Layer w0.3: v1(735.813,184.15) U11.2@737.692,184.15
CTRL_2: U9.6 U11.3 | length 16.2
  Top Layer w0.3: v1(735.813,185.42) 738.454,185.42 738.686,185.189 746.458,185.189 747.674,183.972 U9.6@747.674,182.102
  Bottom Layer w0.3: v1(735.813,185.42) U11.3@737.692,185.42
CTRL_3: U9.7 U11.4 | length 18.2
  Top Layer w0.3: v1(735.813,186.69) 738.378,186.69 739.279,185.789 747.407,185.789 748.944,184.252 U9.7@748.944,182.102
  Bottom Layer w0.3: v1(735.813,186.69) U11.4@737.692,186.69
CTRL_4: U9.9 U11.5 | length 22
  Top Layer w0.3: v1(735.813,187.96) 738.327,187.96 739.899,186.389 749.151,186.389 750.24,187.477 U9.9@750.24,192.034
  Bottom Layer w0.3: v1(735.813,187.96) U11.5@737.692,187.96
CTRL_5: U9.10 U11.6 | length 20.7
  Top Layer w0.3: v1(735.813,189.23) 738.48,189.23 740.721,186.989 748.329,186.989 748.894,187.554 U9.10@748.894,192.084
  Bottom Layer w0.3: v1(735.813,189.23) U11.6@737.692,189.23
CTRL_6: U9.11 U11.7 | length 19
  Top Layer w0.3: v1(735.813,190.5) 738.353,190.5 741.264,187.589 746.947,187.589 747.624,188.265 U9.11@747.624,192.084
  Bottom Layer w0.3: v1(735.813,190.5) U11.7@737.692,190.5
CTRL_7: U9.12 U11.8 | length 17.4
  Top Layer w0.3: v1(735.813,191.77) 738.454,191.77 742.036,188.189 745.592,188.189 746.354,188.951 U9.12@746.354,192.084
  Bottom Layer w0.3: v1(735.813,191.77) U11.8@737.692,191.77
DIO_SCL: R9.2 U9.14 U10.2 | length 19.1
  Top Layer w0.3: v1(744.906,189.281) 743.814,190.373 743.814,193.823 R9.2@745.123,195.132 ; v1(754.367,190.599) U10.2@756.641,190.599
  MidLayer1 w0.3: v1(744.906,189.281) 749.986,189.281 751.304,190.599 v1(754.367,190.599)
DIO_SDA: R8.2 U9.15 U10.1 | length 20.6
  Top Layer w0.3: R8.2@742.886,195.107 742.544,194.765 742.544,189.967 v1(743.255,189.255) ; v1(753.897,191.399) U10.1@756.641,191.399
  MidLayer1 w0.3: v1(743.255,189.255) 744.017,190.017 744.042,189.992 744.144,190.094 749.656,190.094 750.961,191.399 v1(753.897,191.399)
EEP_SCL: R38.1 U10.35 U15.6 | length 22.2
  Top Layer w0.3: U10.35@766.041,193.399 766.041,194.845 767.944,196.748 771.093,196.748 772.795,198.45 777.891,198.45 778.526,197.815 778.526,196.469 778.119,196.063 774.827,196.063 774.509,195.744 R38.1@773.7,195.744
EEP_SDA: R67.1 U10.34 U15.5 | length 12
  Top Layer w0.3: U10.34@766.841,193.399 766.841,194.401 768.184,195.744 R67.1@771.627,195.744 773.215,197.333 U15.5@776.561,197.333
  Top Layer w0.5: R67.1@771.627,195.744 R67.1@771.627,195.783
FLASH: FLASH.1 LED.2 | length 98.5
  MidLayer1 w1: v1(780.212,212.319) 778.154,214.376 778.154,230.124 779.348,231.318 784.936,231.318 785.777,232.158 LED.2@785.777,235.941
  MidLayer2 w1: FLASH.1@730.707,189.662 730.707,191.897 732.536,193.726 774.294,193.726 776.376,195.809 776.376,208.483 v1(780.212,212.319)
GND: "T R G.3" C1.2 C2.2 C4.2 C5.2 C6.2 C7.2 C8.2 C9.2 C10.2 C11.2 C12.2 C13.2 C14.2 C15.2 C16.2 C17.2 C18.2 C19.2 C20.2 C21.2 C22.2 D1.1 D2.1 D4.1 D5.1 D6.1 D15.1 D16.1 D18.1 GND.1 LED.3 R1.2 R2.2 R3.2 R4.2 R5.2 R6.2 R7.2 R10.2 R11.2 R12.2 R13.2 R15.2 R16.2 R28.1 R29.1 R34.1 R35.1 R49.2 R50.2 R51.2 R52.2 R63.2 R64.2 R65.2 R66.2 SOLAR.1 U9.1 U9.2 U9.3 U9.8 U10.16 U11.9 U12.2 U13.1 U13.3 U13.6 U14.4 U15.1 U15.2 U15.3 U15.4 U15.7 U17.4 U18.4 U19.4 U20.4 | length 257.8
  Top Layer w0.3: v1(728.904,198.577) 731.317,198.577 731.456,198.716 C10.2@731.456,199.771 ; v1(734.492,191.795) 734.492,194.437 735.162,195.107 C1.2@737.299,195.107 ; U9.1@741.324,182.102 741.324,180.34 741.797,179.867 749.757,179.867 v1(750.214,180.324) ; v1(742.594,179.867) U9.2@742.594,182.102 ; 743.864,179.867 U9.3@743.864,182.102 ; U9.8@750.214,182.102 v1(750.214,180.324) ; C18.2@752.997,179.045 752.997,179.818 752.491,180.324 v1(750.214,180.324) ; U15.3@781.761,196.063 784.51,196.063 C2.2@785.012,196.565 ; v1@790.232,193.383 U12.2@790.232,195.377
  Top Layer w0.5: R51.2@721.69,205.556 C12.2@721.69,209.074 ; C12.2@721.755,209.382 v2(721.755,210.665) 722.528,211.439 R49.2@723.38,211.439 ; v1@722.687,228.985 R3.2@724.56,228.985 ; R1.2@724.814,223.391 726.56,223.391 D1.1@727.248,222.703 727.248,221.569 726.867,221.188 v1(726.217,221.188) ; v1@735.514,236.579 R4.2@737.362,236.579 ; R7.2@737.413,223.873 739.336,223.873 D4.1@739.871,223.338 739.871,221.899 v1(739.115,221.142) ; v2(740.994,204.953) 740.994,204.835 740.22,205.609 739.699,205.609 739.699,209.546 C13.2@739.941,209.788 739.941,211.148 740.715,211.922 R50.2@741.592,211.922 ; v1@744.353,236.554 R5.2@746.176,236.554 ; C11.2@749.591,200.771 750.646,200.771 750.9,201.025 v1(750.9,201.533) ; R11.2@750.113,223.848 750.887,223.848 751.752,222.982 D6.1@752.546,222.982 752.546,221.772 v1(751.865,221.091) ; R65.2@753.186,205.851 753.186,210.677 754.278,211.769 R63.2@754.724,211.769 ; R65.2@753.212,205.965 753.835,205.965 755.218,204.581 v2(755.726,204.581) ; v1(762.041,180.009) U10.16@762.041,181.399 ; C15.2@762.952,200.974 763.549,200.974 v1(764.362,201.787) ; 765.003,236.732 R6.2@766.75,236.732 ; R13.2@765.861,223.899 766.244,223.899 767.008,223.135 D16.1@768.294,223.135 768.294,222.476 v1(767.198,221.38) ; R64.2@768.491,212.15 767.613,212.15 766.674,211.211 R66.2@766.674,205.812 768.211,205.812 v2(769.442,204.581) ; v1(776.199,218.618) R15.2@776.199,220.292 ; U15.7@776.561,194.793 U15.2@781.761,194.793 ; C14.2@776.718,200.771 778.078,200.771 778.332,201.025 v1(778.332,201.533) ; C8.2@779.893,228.229 C5.2@782.469,228.229 ; C9.2@780.138,191.541 780.138,193.001 780.659,193.523 U15.1@781.761,193.523 U15.4@781.761,197.333 ; v1@781.38,225.943 C7.2@782.664,225.943 C5.2@782.664,228.39 ; U14.4@781.66,221.971 781.66,221.082 781.99,220.751 v1(781.99,220.253) ; v1(781.99,219.491) 782.599,218.881 C6.2@783.308,218.881 ; v1(784.962,211.912) 786.349,210.525 788.111,210.525 788.67,209.966 788.67,208.442 v1(788.213,207.985) U13.3@786.807,207.985 ; U13.6@792.007,207.985 794.912,207.985 C4.2@795.249,208.321
  Top Layer w1: C2.2@785.012,196.565 785.012,196.444 786.279,195.177 U12.2@790.232,195.177 ; U12.2@790.232,195.377 U12.2@790.232,201.927 ; C4.2@795.249,208.321 C4.2@795.602,208.674
  MidLayer2 w0.5: v1(726.217,221.188) v1@739.069,221.188 ; v1(739.115,221.142) v1@751.815,221.142 ; v1(751.865,221.091) 766.909,221.091 v1(767.198,221.38)
  Bottom Layer w0.3: v1(734.492,191.795) 734.492,192.735 734.797,193.04 U11.9@737.692,193.04 ; v1(744.042,215.249) 744.804,214.487 R29.1@745.148,214.487 ; v1(769.95,215.503) 770.472,215.503 R35.1@770.98,214.995
  Bottom Layer w0.5: v1(723.214,215.163) 724.637,215.163 725.26,214.54 R28.1@725.26,213.725 ; R2.2@723.798,224.077 724.09,224.077 724.803,223.363 D2.1@726.217,223.363 v1(726.217,221.188) ; C19.2@728.306,204.048 730.377,204.048 ; v1(728.904,198.577) 730.377,200.05 U17.4@730.377,206.751 ; R10.2@736.117,223.823 737.898,223.823 739.115,222.606 v1(739.115,221.142) ; C20.2@748.55,204.581 v2(750.9,204.581) 750.9,206.165 U18.4@749.843,207.223 ; R12.2@748.894,223.594 750.802,223.594 751.865,222.53 v1(751.865,221.091) ; v1(757.25,215.087) 758.266,214.829 R34.1@758.077,214.64 ; C21.2@761.58,204.581 v2(764.362,204.581) 762.949,205.994 U19.4@762.949,207.451 ; R16.2@764.819,223.721 766.727,223.721 D18.1@767.198,223.25 v1(767.198,221.38) ; R35.1@770.966,215.009 R35.1@770.98,214.995 ; C22.2@774.483,204.581 v2(778.078,204.581) 778.078,206.359 776.834,207.604 U20.4@775.801,207.604
  other v1: 751.967,180.848 752.983,180.848 753.999,180.848 751.967,181.864 752.983,181.864 753.999,181.864 762.254,183.591 763.27,183.591 764.286,183.591 765.302,183.591 762.254,184.607 763.27,184.607 764.286,184.607 765.302,184.607 762.254,185.623 763.27,185.623 764.286,185.623 765.302,185.623 734.492,187.503 734.492,188.519 760.578,189.078 761.594,189.078 762.61,189.078 763.626,189.078 734.492,189.535 760.578,190.094 761.594,190.094 762.61,190.094 763.626,190.094 734.492,190.551 760.578,191.11 761.594,191.11 762.61,191.11 763.626,191.11 790.321,192.278 791.337,192.278 790.321,193.294 791.337,193.294 754.228,195.656 755.244,195.656 756.26,195.656 757.276,195.656 754.228,196.672 755.244,196.672 756.26,196.672 757.276,196.672 764.388,203.429 742.95,204.902 742.01,204.927 755.752,205.537 756.844,205.537 769.442,205.537 770.357,205.537 764.413,205.562 793.674,207.985 779.958,215.427 780.974,215.427 781.99,215.427 783.26,215.427 754.101,215.925 755.117,215.925 756.133,215.925 757.149,215.925 779.958,216.443 780.974,216.443 781.99,216.443 783.26,216.443 754.101,216.941 755.117,216.941 756.133,216.941 757.149,216.941 779.958,217.205 768.213,217.576 769.229,217.576 770.245,217.576 771.261,217.576 754.101,217.957 755.117,217.957 756.133,217.957 757.149,217.957 779.958,218.221 768.213,218.592 769.229,218.592 770.245,218.592 771.261,218.592 779.958,219.237 780.974,219.491 768.213,219.608 769.229,219.608 770.245,219.608 771.261,219.608 779.958,220.253 780.974,220.253 779.958,221.015 779.704,225.333 780.466,225.333 781.228,225.333 779.704,226.095 780.466,226.095 781.228,226.095 722.579,227.568 723.341,227.568 724.103,227.568 725.119,227.568 725.881,227.568 726.643,227.568 722.579,228.33 726.643,228.33 722.579,229.092 726.643,229.092 722.579,229.854 726.643,229.854 735.355,235.214 736.117,235.214 736.879,235.214 737.895,235.214 738.657,235.214 739.419,235.214 744.144,235.239 744.906,235.239 745.668,235.239 746.684,235.239 747.446,235.239 748.208,235.239 764.743,235.468 765.505,235.468 766.267,235.468 767.283,235.468 768.045,235.468 768.807,235.468 735.355,235.976 739.419,235.976 744.144,236.001 748.208,236.001 764.743,236.23 768.807,236.23 735.355,236.738 739.419,236.738 744.144,236.763 748.208,236.763 764.743,236.992 768.807,236.992 735.355,237.5 739.419,237.5 744.144,237.525 748.208,237.525 764.743,237.754 768.807,237.754 785.978,242.57 786.994,242.57 788.01,242.57 785.978,243.586 786.994,243.586 788.01,243.586 785.978,244.602 786.994,244.602 788.01,244.602 785.978,245.618 786.994,245.618 788.01,245.618
MCU_RXD: "T R G.2" U10.18 | length 20
  Top Layer w0.3: U10.18@763.641,181.399 763.641,179.157 764.159,178.638 770.763,178.638 773.278,181.153 776.376,181.153 777.611,182.387 777.611,184.404
MCU_RXD2_2: R69.1 U10.39 | length 2.7
  Top Layer w0.5: U10.39@762.841,193.399 762.841,196.077 R69.1@762.852,196.088
MCU_TXD: "T R G.1" U10.19 | length 14.4
  Top Layer w0.3: U10.19@764.441,181.399 764.438,179.664 764.804,179.299 769.595,179.299 773.43,183.134 775.411,183.134
MCU_TXD2_2: R68.1 U10.6 | length 23
  Top Layer w0.3: v1(753.872,187.401) U10.6@756.641,187.399
  Top Layer w0.5: v1@772.402,187.44 R68.1@772.402,189.205
  Bottom Layer w0.3: v1(753.872,187.401) 769.874,187.385 v1(772.363,187.401)
NetC3_1: C3.1 U13.2 | length 5.7
  Top Layer w0.5: C3.1@782.777,211.988 783.412,211.988 784.733,210.668 784.733,209.829 785.308,209.255 U13.2@786.807,209.255
NetC3_2: C3.2 U13.4 | length 5.1
  Top Layer w0.5: C3.2@782.777,209.188 783.164,209.188 785.638,206.715 U13.4@786.807,206.715
NetC7_1: C7.1 U14.8 | length 3.4
  Top Layer w0.3: C7.1@784.364,225.943 784.364,224.737 784.987,224.114 U14.8@786.304,224.114
NetC8_1: C8.1 R37.2 | length 2.3
  Top Layer w0.5: R37.2@778.154,225.878 C8.1@778.154,228.19
NetD3_1: D3.1 L2.2 U14.5 | length 10.3
  Top Layer w1: 786.308,221.64 788.391,221.64 791.124,218.907 L2.2@791.896,218.907 ; D3.1@790.448,216.062 790.448,217.297 L2.2@792.124,218.973
NetD7_1: D7.1 D9.2 U25.1 | length 9
  Top Layer w0.5: U25.1@727.685,206.925 727.685,208.315 729.33,209.961 D7.1@729.33,211.044 729.753,211.044 732.014,213.305 D9.2@732.15,213.305 ; D9.2@731.926,212.961 D9.2@731.926,213.415
NetD7_2: D7.2 R43.2 R45.1 U25.2 | length 18.2
  Top Layer w0.5: D7.2@729.31,213.441 728.952,213.799 R45.1@726.706,213.799 726.706,208.756 726.415,208.465 726.415,204.96 726.694,204.68 728.726,204.68 730.01,205.964 R43.2@730.01,208.204
NetD8_1: D8.1 D10.2 U26.1 | length 8.6
  Top Layer w0.5: U26.1@745.719,206.851 745.719,208.495 747.39,210.167 D8.1@747.39,211.374 ; D8.1@747.539,211.225 D10.2@749.935,213.621